# EAGLE board ADC_Block_Panel_v21 (EAGLE 7.5.0), part 1 of 7
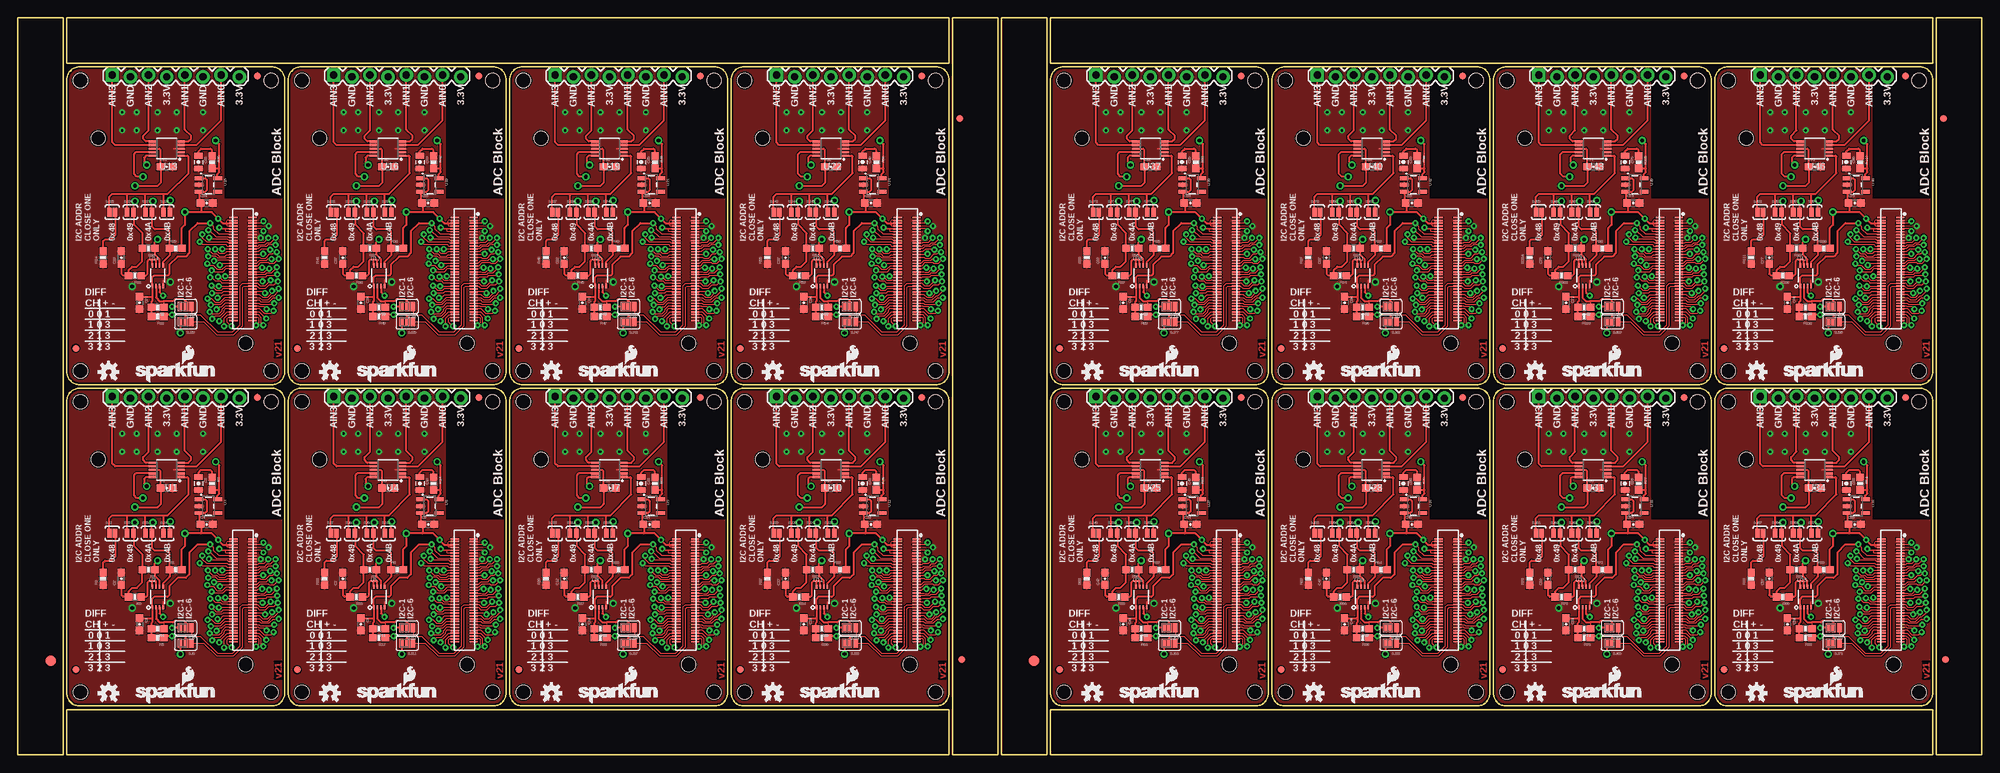
[diagram p0: board, top side]
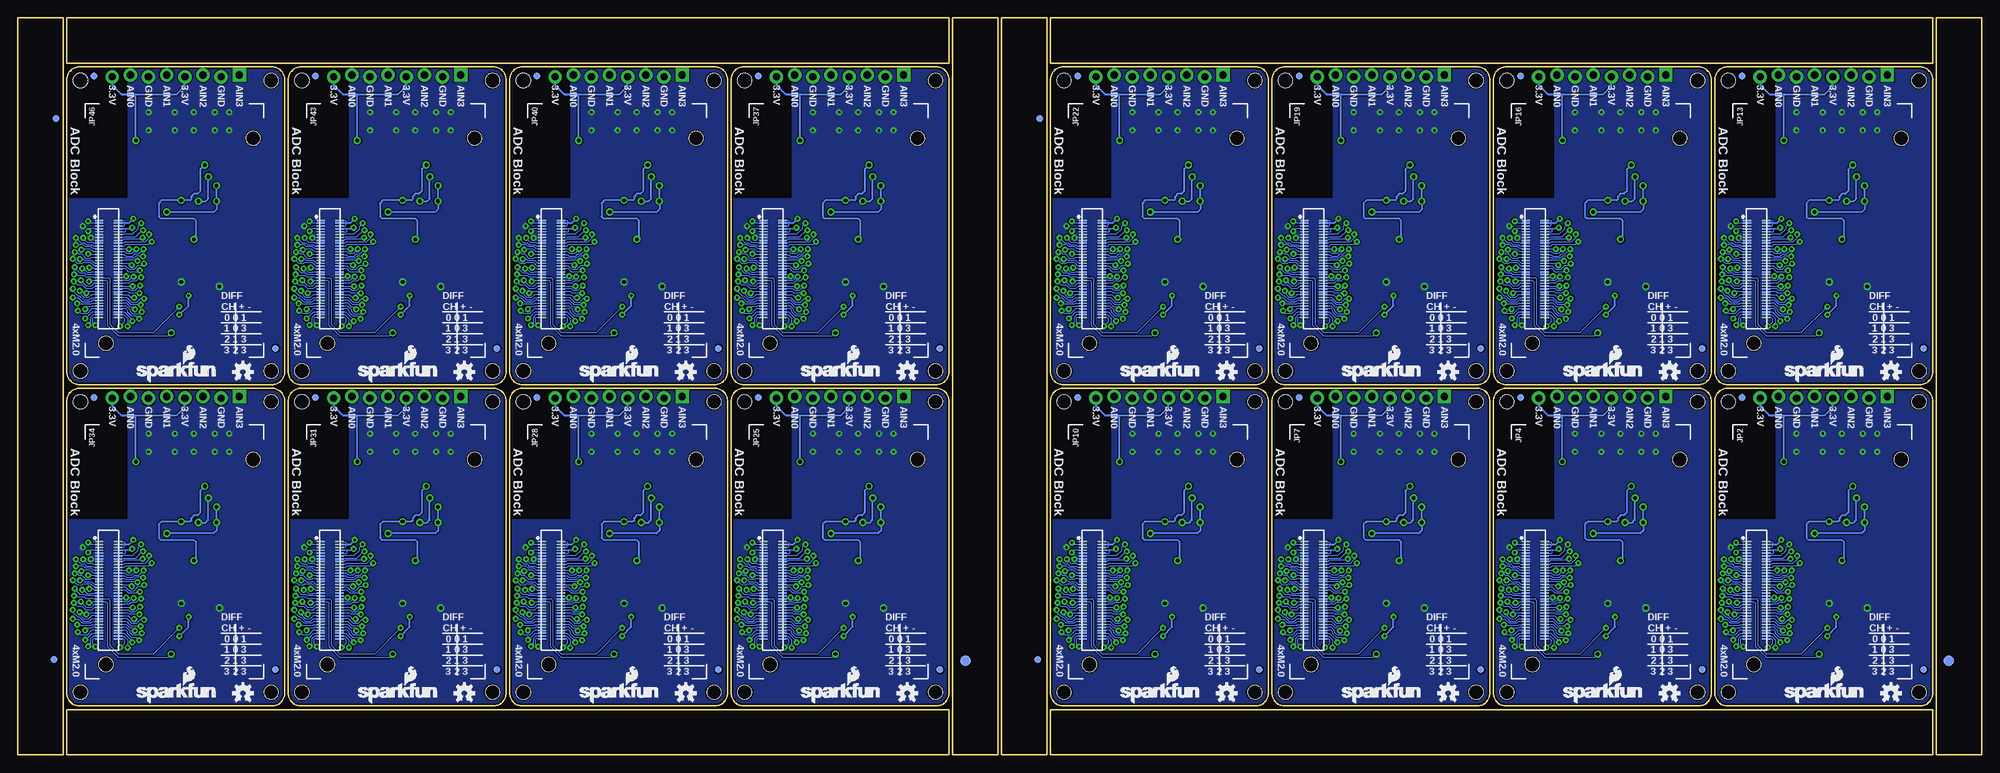
[diagram p1: board, bottom side, seen from below]

Size 274.83 x 103.12 mm. Coordinates in mm from the lower left corner, seen from the top.
Outline: 176 segments
Copper layers (1*16): Top 0.035mm / dielectric 1.5mm / Bottom 0.035mm
Design rules "Casey_Edison-2-Layer": minimum track width 6mil, minimum drill 13mil, track to track 6mil, track to pad 6mil, pad to pad 6mil, via to via 6mil, smd to smd 6mil, copper to edge 8mil, drill to drill 8mil, minimum pad ring 12mil, minimum via ring 10mil, stop-mask expansion 4mil, vias tented up to drill 20mil, thermal gap 6mil
Holes 2 mm at 35.43,8.76 8.76,8.76 8.76,49.4 35.43,49.4 66.42,8.76 39.75,8.76 39.75,49.4 66.42,49.4 97.41,8.76 70.74,8.76 70.74,49.4 97.41,49.4 128.4,8.76 101.73,8.76 101.73,49.4 128.4,49.4 35.43,53.72 8.76,53.72 8.76,94.36 35.43,94.36 66.42,53.72 39.75,53.72 39.75,94.36 66.42,94.36 97.41,53.72 70.74,53.72 70.74,94.36 97.41,94.36 128.4,53.72 101.73,53.72 101.73,94.36 128.4,94.36 173.1,8.76 146.43,8.76 146.43,49.4 173.1,49.4 204.09,8.76 177.42,8.76 177.42,49.4 204.09,49.4 235.08,8.76 208.41,8.76 208.41,49.4 235.08,49.4 266.06,8.76 239.4,8.76 239.4,49.4 266.06,49.4 173.1,53.72 146.43,53.72 146.43,94.36 173.1,94.36 204.09,53.72 177.42,53.72 177.42,94.36 204.09,94.36 235.08,53.72 208.41,53.72 208.41,94.36 235.08,94.36 266.06,53.72 239.4,53.72 239.4,94.36 266.06,94.36
tRestrict: area 29,33 to 37.3,51.3; area 59.9,33 to 68.3,51.3; area 90.9,33 to 99.3,51.3; area 121.9,33 to 130.3,51.3; area 29,78 to 37.3,96.3; area 59.9,78 to 68.3,96.3; area 90.9,78 to 99.3,96.3; area 121.9,78 to 130.3,96.3; area 166.6,33 to 175,51.3; area 197.6,33 to 206,51.3; area 228.6,33 to 237,51.3; area 259.6,33 to 268,51.3; 4 more areas; 32 lines
bRestrict: area 29,33 to 37.3,51.3; area 59.9,33 to 68.3,51.3; area 90.9,33 to 99.3,51.3; area 121.9,33 to 130.3,51.3; area 29,78 to 37.3,96.3; area 59.9,78 to 68.3,96.3; area 90.9,78 to 99.3,96.3; area 121.9,78 to 130.3,96.3; area 166.6,33 to 175,51.3; area 197.6,33 to 206,51.3; area 228.6,33 to 237,51.3; area 259.6,33 to 268,51.3; 4 more areas

## Footprints (pad centres in the part's own frame; a part is rotated, then mirrored left to right if it is on the bottom)
0603-CAP = smd 1.1 x 1: 1 -0.85,0; 2 0.85,0
0805-CAP = smd 0.8 x 1.2: 1 -0.9,0; 2 0.9,0
FIDUCIAL-1.5X3 = smd 1.5 x 1.5: 1 0,0
FIDUCIAL-1X2 = smd 1 x 1: 1 0,0
1X08_LOCK = drill 1.016 pad 1.88 square: 1 0,0.127 | drill 1.016 pad 1.88: 2 2.54,-0.127; 3 5.08,0.127; 4 7.62,-0.127; 5 10.16,0.127; 6 12.7,-0.127; 7 15.24,0.127; 8 17.78,-0.127
EDISON_DAUGHTER = smd 1.14 x 0.2: 1 1.98,19.17; 2 4.62,19.17; 3 1.98,18.77; 4 4.62,18.77; 5 1.98,18.37; 6 4.62,18.37; 7 1.98,17.97; 8 4.62,17.97; 9 1.98,17.57; 10 4.62,17.57; 11 1.98,17.17; 12 4.62,17.17; 13 1.98,16.77; 14 4.62,16.77; 15 1.98,16.37; 16 4.62,16.37; 17 1.98,15.97; 18 4.62,15.97; 19 1.98,15.57; 20 4.62,15.57; 21 1.98,15.17; 22 4.62,15.17; 23 1.98,14.77; 24 4.62,14.77; 25 1.98,14.37; 26 4.62,14.37; 27 1.98,13.97; 28 4.62,13.97; 29 1.98,13.57; 30 4.62,13.57; 31 1.98,13.17; 32 4.62,13.17; 33 1.98,12.77; 34 4.62,12.77; 35 1.98,12.37; 36 4.62,12.37; 37 1.98,11.97; 38 4.62,11.97; 39 1.98,11.57; 40 4.62,11.57; 41 1.98,11.17; 42 4.62,11.17; 43 1.98,10.77; 44 4.62,10.77; 45 1.98,10.37; 46 4.62,10.37; 47 1.98,9.97; 48 4.62,9.97; 49 1.98,9.57; 50 4.62,9.57; 51 1.98,9.17; 52 4.62,9.17; 53 1.98,8.77; 54 4.62,8.77; 55 1.98,8.37; 56 4.62,8.37; 57 1.98,7.97; 58 4.62,7.97; 59 1.98,7.57; 60 4.62,7.57; 61 1.98,7.17; 62 4.62,7.17; 63 1.98,6.77; 64 4.62,6.77; 65 1.98,6.37; 66 4.62,6.37; 67 1.98,5.97; 68 4.62,5.97; 69 1.98,5.57; 70 4.62,5.57 | hole 2: 23.53,30.67; 2.93,1.98
DF40C-70DP-0.4(51) = smd 0.2 x 1.14 bottom: 1 6.8,1.32; 2 6.8,-1.32; 3 6.4,1.32; 4 6.4,-1.32; 5 6,1.32; 6 6,-1.32; 7 5.6,1.32; 8 5.6,-1.32; 9 5.2,1.32; 10 5.2,-1.32; 11 4.8,1.32; 12 4.8,-1.32; 13 4.4,1.32; 14 4.4,-1.32; 15 4,1.32; 16 4,-1.32; 17 3.6,1.32; 18 3.6,-1.32; 19 3.2,1.32; 20 3.2,-1.32; 21 2.8,1.32; 22 2.8,-1.32; 23 2.4,1.32; 24 2.4,-1.32; 25 2,1.32; 26 2,-1.32; 27 1.6,1.32; 28 1.6,-1.32; 29 1.2,1.32; 30 1.2,-1.32; 31 0.8,1.32; 32 0.8,-1.32; 33 0.4,1.32; 34 0.4,-1.32; 35 0,1.32; 36 0,-1.32; 37 -0.4,1.32; 38 -0.4,-1.32; 39 -0.8,1.32; 40 -0.8,-1.32; 41 -1.2,1.32; 42 -1.2,-1.32; 43 -1.6,1.32; 44 -1.6,-1.32; 45 -2,1.32; 46 -2,-1.32; 47 -2.4,1.32; 48 -2.4,-1.32; 49 -2.8,1.32; 50 -2.8,-1.32; 51 -3.2,1.32; 52 -3.2,-1.32; 53 -3.6,1.32; 54 -3.6,-1.32; 55 -4,1.32; 56 -4,-1.32; 57 -4.4,1.32; 58 -4.4,-1.32; 59 -4.8,1.32; 60 -4.8,-1.32; 61 -5.2,1.32; 62 -5.2,-1.32; 63 -5.6,1.32; 64 -5.6,-1.32; 65 -6,1.32; 66 -6,-1.32; 67 -6.4,1.32; 68 -6.4,-1.32; 69 -6.8,1.32; 70 -6.8,-1.32; NC1 7.2,1.32; NC2 7.2,-1.32; NC3 -7.2,-1.32; NC4 -7.2,1.32
0603-RES = smd 1.1 x 1: 1 -0.85,0; 2 0.85,0
PAD-JUMPER-2-NC_BY_PASTE_YES_SILK = smd 0.635 x 1.27: 1 -0.401,0; 2 0.413,0
PAD-JUMPER-2-NO_YES_SILK = smd 0.635 x 1.27: 1 -0.45,0; 2 0.45,0
PAD-JUMPER-3-2OF3_NC_BY_PASTE_YES_SILK_FULL_BOX = smd 0.635 x 1.27: 1 -0.813,0; 2 0,0; 3 0.813,0
MSOP10 = smd 0.3 x 1: 1 -1,-2.05; 2 -0.5,-2.05; 3 0,-2.05; 4 0.5,-2.05; 5 1,-2.05; 6 1,2.05; 7 0.5,2.05; 8 0,2.05; 9 -0.5,2.05; 10 -1,2.05
PCA9306DC-1:1 = smd 0.25 x 0.602: 1 -0.73,-1.446; 2 -0.23,-1.446; 3 0.27,-1.446; 4 0.77,-1.446; 5 0.77,1.431; 6 0.27,1.431; 7 -0.23,1.431; 8 -0.73,1.431
SOT23-5 = smd 0.55 x 1.2: 1 -0.95,-1.3; 2 0,-1.3; 3 0.95,-1.3; 4 0.95,1.3; 5 -0.95,1.3

## Placement (x,y rotation side)
C1  0.1uF  [0603-CAP]  20.83,37.34 0 top
C2  0.1uF  [0603-CAP]  14.48,24.64 90 top
C3  0.1uF  [0603-CAP]  17.02,18.29 270 top
C4  0.1uF  [0603-CAP]  26.42,32.26 0 top
C5  10uF  [0805-CAP]  25.27,37.97 270 top
C6  0.1uF  [0603-CAP]  51.82,37.34 0 top
C7  0.1uF  [0603-CAP]  45.47,24.64 90 top
C8  0.1uF  [0603-CAP]  48.01,18.29 270 top
C9  0.1uF  [0603-CAP]  57.4,32.26 0 top
C10  10uF  [0805-CAP]  56.26,37.97 270 top
C11  0.1uF  [0603-CAP]  82.8,37.34 0 top
C12  0.1uF  [0603-CAP]  76.45,24.64 90 top
C13  0.1uF  [0603-CAP]  78.99,18.29 270 top
C14  0.1uF  [0603-CAP]  88.39,32.26 0 top
C15  10uF  [0805-CAP]  87.25,37.97 270 top
C16  0.1uF  [0603-CAP]  113.79,37.34 0 top
C17  0.1uF  [0603-CAP]  107.44,24.64 90 top
C18  0.1uF  [0603-CAP]  109.98,18.29 270 top
C19  0.1uF  [0603-CAP]  119.38,32.26 0 top
C20  10uF  [0805-CAP]  118.24,37.97 270 top
C21  0.1uF  [0603-CAP]  20.83,82.3 0 top
C22  0.1uF  [0603-CAP]  14.48,69.6 90 top
C23  0.1uF  [0603-CAP]  17.02,63.25 270 top
C24  0.1uF  [0603-CAP]  26.42,77.22 0 top
C25  10uF  [0805-CAP]  25.27,82.93 270 top
C26  0.1uF  [0603-CAP]  51.82,82.3 0 top
C27  0.1uF  [0603-CAP]  45.47,69.6 90 top
C28  0.1uF  [0603-CAP]  48.01,63.25 270 top
C29  0.1uF  [0603-CAP]  57.4,77.22 0 top
C30  10uF  [0805-CAP]  56.26,82.93 270 top
C31  0.1uF  [0603-CAP]  82.8,82.3 0 top
C32  0.1uF  [0603-CAP]  76.45,69.6 90 top
C33  0.1uF  [0603-CAP]  78.99,63.25 270 top
C34  0.1uF  [0603-CAP]  88.39,77.22 0 top
C35  10uF  [0805-CAP]  87.25,82.93 270 top
C36  0.1uF  [0603-CAP]  113.79,82.3 0 top
C37  0.1uF  [0603-CAP]  107.44,69.6 90 top
C38  0.1uF  [0603-CAP]  109.98,63.25 270 top
C39  0.1uF  [0603-CAP]  119.38,77.22 0 top
C40  10uF  [0805-CAP]  118.24,82.93 270 top
C41  0.1uF  [0603-CAP]  158.5,37.34 0 top
C42  0.1uF  [0603-CAP]  152.15,24.64 90 top
C43  0.1uF  [0603-CAP]  154.69,18.29 270 top
C44  0.1uF  [0603-CAP]  164.08,32.26 0 top
C45  10uF  [0805-CAP]  162.94,37.97 270 top
C46  0.1uF  [0603-CAP]  189.48,37.34 0 top
C47  0.1uF  [0603-CAP]  183.13,24.64 90 top
C48  0.1uF  [0603-CAP]  185.67,18.29 270 top
C49  0.1uF  [0603-CAP]  195.07,32.26 0 top
C50  10uF  [0805-CAP]  193.93,37.97 270 top
C51  0.1uF  [0603-CAP]  220.47,37.34 0 top
C52  0.1uF  [0603-CAP]  214.12,24.64 90 top
C53  0.1uF  [0603-CAP]  216.66,18.29 270 top
C54  0.1uF  [0603-CAP]  226.06,32.26 0 top
C55  10uF  [0805-CAP]  224.92,37.97 270 top
C56  0.1uF  [0603-CAP]  251.46,37.34 0 top
C57  0.1uF  [0603-CAP]  245.11,24.64 90 top
C58  0.1uF  [0603-CAP]  247.65,18.29 270 top
C59  0.1uF  [0603-CAP]  257.05,32.26 0 top
C60  10uF  [0805-CAP]  255.91,37.97 270 top
C61  0.1uF  [0603-CAP]  158.5,82.3 0 top
C62  0.1uF  [0603-CAP]  152.15,69.6 90 top
C63  0.1uF  [0603-CAP]  154.69,63.25 270 top
C64  0.1uF  [0603-CAP]  164.08,77.22 0 top
C65  10uF  [0805-CAP]  162.94,82.93 270 top
C66  0.1uF  [0603-CAP]  189.48,82.3 0 top
C67  0.1uF  [0603-CAP]  183.13,69.6 90 top
C68  0.1uF  [0603-CAP]  185.67,63.25 270 top
C69  0.1uF  [0603-CAP]  195.07,77.22 0 top
C70  10uF  [0805-CAP]  193.93,82.93 270 top
C71  0.1uF  [0603-CAP]  220.47,82.3 0 top
C72  0.1uF  [0603-CAP]  214.12,69.6 90 top
C73  0.1uF  [0603-CAP]  216.66,63.25 270 top
C74  0.1uF  [0603-CAP]  226.06,77.22 0 top
C75  10uF  [0805-CAP]  224.92,82.93 270 top
C76  0.1uF  [0603-CAP]  251.46,82.3 0 top
C77  0.1uF  [0603-CAP]  245.11,69.6 90 top
C78  0.1uF  [0603-CAP]  247.65,63.25 270 top
C79  0.1uF  [0603-CAP]  257.05,77.22 0 top
C80  10uF  [0805-CAP]  255.91,82.93 270 top
E$1  [FIDUCIAL-1.5X3]  4.57,13.21 0 top
E$2  [FIDUCIAL-1X2]  269.49,89.03 90 top
E$3  [FIDUCIAL-1X2]  269.75,13.34 270 top
E$4  [FIDUCIAL-1.5X3]  142.24,13.21 0 top
E$5  [FIDUCIAL-1.5X3]  4.57,13.21 0 bottom
E$6  [FIDUCIAL-1X2]  132.08,13.34 270 bottom
E$7  [FIDUCIAL-1X2]  131.83,89.03 90 top
E$8  [FIDUCIAL-1X2]  132.08,13.34 270 top
E$9  [FIDUCIAL-1.5X3]  142.24,13.21 0 bottom
E$10  [FIDUCIAL-1X2]  131.83,89.03 90 bottom
E$11  [FIDUCIAL-1X2]  269.75,13.34 270 bottom
E$12  [FIDUCIAL-1X2]  269.49,89.03 90 bottom
FID1  FIDUCIAL1X2  [FIDUCIAL-1X2]  8.13,11.94 0 top
FID2  FIDUCIAL1X2  [FIDUCIAL-1X2]  33.53,50.04 0 top
FID3  FIDUCIAL1X2  [FIDUCIAL-1X2]  33.53,50.04 0 bottom
FID4  FIDUCIAL1X2  [FIDUCIAL-1X2]  8.13,11.94 0 bottom
FID5  FIDUCIAL1X2  [FIDUCIAL-1X2]  39.12,11.94 0 top
FID6  FIDUCIAL1X2  [FIDUCIAL-1X2]  64.52,50.04 0 top
FID7  FIDUCIAL1X2  [FIDUCIAL-1X2]  64.52,50.04 0 bottom
FID8  FIDUCIAL1X2  [FIDUCIAL-1X2]  39.12,11.94 0 bottom
FID9  FIDUCIAL1X2  [FIDUCIAL-1X2]  70.1,11.94 0 top
FID10  FIDUCIAL1X2  [FIDUCIAL-1X2]  95.5,50.04 0 top
FID11  FIDUCIAL1X2  [FIDUCIAL-1X2]  95.5,50.04 0 bottom
FID12  FIDUCIAL1X2  [FIDUCIAL-1X2]  70.1,11.94 0 bottom
FID13  FIDUCIAL1X2  [FIDUCIAL-1X2]  101.09,11.94 0 top
FID14  FIDUCIAL1X2  [FIDUCIAL-1X2]  126.49,50.04 0 top
FID15  FIDUCIAL1X2  [FIDUCIAL-1X2]  126.49,50.04 0 bottom
FID16  FIDUCIAL1X2  [FIDUCIAL-1X2]  101.09,11.94 0 bottom
FID17  FIDUCIAL1X2  [FIDUCIAL-1X2]  8.13,56.9 0 top
FID18  FIDUCIAL1X2  [FIDUCIAL-1X2]  33.53,95 0 top
FID19  FIDUCIAL1X2  [FIDUCIAL-1X2]  33.53,95 0 bottom
FID20  FIDUCIAL1X2  [FIDUCIAL-1X2]  8.13,56.9 0 bottom
FID21  FIDUCIAL1X2  [FIDUCIAL-1X2]  39.12,56.9 0 top
FID22  FIDUCIAL1X2  [FIDUCIAL-1X2]  64.52,95 0 top
FID23  FIDUCIAL1X2  [FIDUCIAL-1X2]  64.52,95 0 bottom
FID24  FIDUCIAL1X2  [FIDUCIAL-1X2]  39.12,56.9 0 bottom
FID25  FIDUCIAL1X2  [FIDUCIAL-1X2]  70.1,56.9 0 top
FID26  FIDUCIAL1X2  [FIDUCIAL-1X2]  95.5,95 0 top
FID27  FIDUCIAL1X2  [FIDUCIAL-1X2]  95.5,95 0 bottom
FID28  FIDUCIAL1X2  [FIDUCIAL-1X2]  70.1,56.9 0 bottom
FID29  FIDUCIAL1X2  [FIDUCIAL-1X2]  101.09,56.9 0 top
FID30  FIDUCIAL1X2  [FIDUCIAL-1X2]  126.49,95 0 top
FID31  FIDUCIAL1X2  [FIDUCIAL-1X2]  126.49,95 0 bottom
FID32  FIDUCIAL1X2  [FIDUCIAL-1X2]  101.09,56.9 0 bottom
FID33  FIDUCIAL1X2  [FIDUCIAL-1X2]  145.8,11.94 0 top
FID34  FIDUCIAL1X2  [FIDUCIAL-1X2]  171.2,50.04 0 top
FID35  FIDUCIAL1X2  [FIDUCIAL-1X2]  171.2,50.04 0 bottom
FID36  FIDUCIAL1X2  [FIDUCIAL-1X2]  145.8,11.94 0 bottom
FID37  FIDUCIAL1X2  [FIDUCIAL-1X2]  176.78,11.94 0 top
FID38  FIDUCIAL1X2  [FIDUCIAL-1X2]  202.18,50.04 0 top
FID39  FIDUCIAL1X2  [FIDUCIAL-1X2]  202.18,50.04 0 bottom
FID40  FIDUCIAL1X2  [FIDUCIAL-1X2]  176.78,11.94 0 bottom
FID41  FIDUCIAL1X2  [FIDUCIAL-1X2]  207.77,11.94 0 top
FID42  FIDUCIAL1X2  [FIDUCIAL-1X2]  233.17,50.04 0 top
FID43  FIDUCIAL1X2  [FIDUCIAL-1X2]  233.17,50.04 0 bottom
FID44  FIDUCIAL1X2  [FIDUCIAL-1X2]  207.77,11.94 0 bottom
FID45  FIDUCIAL1X2  [FIDUCIAL-1X2]  238.76,11.94 0 top
FID46  FIDUCIAL1X2  [FIDUCIAL-1X2]  264.16,50.04 0 top
FID47  FIDUCIAL1X2  [FIDUCIAL-1X2]  264.16,50.04 0 bottom
FID48  FIDUCIAL1X2  [FIDUCIAL-1X2]  238.76,11.94 0 bottom
FID49  FIDUCIAL1X2  [FIDUCIAL-1X2]  145.8,56.9 0 top
FID50  FIDUCIAL1X2  [FIDUCIAL-1X2]  171.2,95 0 top
FID51  FIDUCIAL1X2  [FIDUCIAL-1X2]  171.2,95 0 bottom
FID52  FIDUCIAL1X2  [FIDUCIAL-1X2]  145.8,56.9 0 bottom
FID53  FIDUCIAL1X2  [FIDUCIAL-1X2]  176.78,56.9 0 top
FID54  FIDUCIAL1X2  [FIDUCIAL-1X2]  202.18,95 0 top
FID55  FIDUCIAL1X2  [FIDUCIAL-1X2]  202.18,95 0 bottom
FID56  FIDUCIAL1X2  [FIDUCIAL-1X2]  176.78,56.9 0 bottom
FID57  FIDUCIAL1X2  [FIDUCIAL-1X2]  207.77,56.9 0 top
FID58  FIDUCIAL1X2  [FIDUCIAL-1X2]  233.17,95 0 top
FID59  FIDUCIAL1X2  [FIDUCIAL-1X2]  233.17,95 0 bottom
FID60  FIDUCIAL1X2  [FIDUCIAL-1X2]  207.77,56.9 0 bottom
FID61  FIDUCIAL1X2  [FIDUCIAL-1X2]  238.76,56.9 0 top
FID62  FIDUCIAL1X2  [FIDUCIAL-1X2]  264.16,95 0 top
FID63  FIDUCIAL1X2  [FIDUCIAL-1X2]  264.16,95 0 bottom
FID64  FIDUCIAL1X2  [FIDUCIAL-1X2]  238.76,56.9 0 bottom
JP1  [1X08_LOCK]  13.21,50.04 0 top
JP2  EDISON_CONNECTOR_FULLMOUNTING_HOLES  [EDISON_DAUGHTER]  34.8,10.67 0 bottom
JP3  EDISON_CONNECTOR_FULLHEADER  [DF40C-70DP-0.4(51)]  31.5,23.04 90 bottom
JP4  EDISON_CONNECTOR_FULLMOUNTING_HOLES  [EDISON_DAUGHTER]  65.79,10.67 0 bottom
JP5  EDISON_CONNECTOR_FULLHEADER  [DF40C-70DP-0.4(51)]  62.49,23.04 90 bottom
JP6  [1X08_LOCK]  44.2,50.04 0 top
JP7  EDISON_CONNECTOR_FULLMOUNTING_HOLES  [EDISON_DAUGHTER]  96.77,10.67 0 bottom
JP8  EDISON_CONNECTOR_FULLHEADER  [DF40C-70DP-0.4(51)]  93.47,23.04 90 bottom
JP9  [1X08_LOCK]  75.18,50.04 0 top
JP10  EDISON_CONNECTOR_FULLMOUNTING_HOLES  [EDISON_DAUGHTER]  127.76,10.67 0 bottom
JP11  EDISON_CONNECTOR_FULLHEADER  [DF40C-70DP-0.4(51)]  124.46,23.04 90 bottom
JP12  [1X08_LOCK]  106.17,50.04 0 top
JP13  EDISON_CONNECTOR_FULLMOUNTING_HOLES  [EDISON_DAUGHTER]  34.8,55.63 0 bottom
JP14  EDISON_CONNECTOR_FULLHEADER  [DF40C-70DP-0.4(51)]  31.5,68 90 bottom
JP15  [1X08_LOCK]  13.21,95 0 top
JP16  EDISON_CONNECTOR_FULLMOUNTING_HOLES  [EDISON_DAUGHTER]  65.79,55.63 0 bottom
JP17  EDISON_CONNECTOR_FULLHEADER  [DF40C-70DP-0.4(51)]  62.49,68 90 bottom
JP18  [1X08_LOCK]  44.2,95 0 top
JP19  EDISON_CONNECTOR_FULLMOUNTING_HOLES  [EDISON_DAUGHTER]  96.77,55.63 0 bottom
JP20  EDISON_CONNECTOR_FULLHEADER  [DF40C-70DP-0.4(51)]  93.47,68 90 bottom
JP21  [1X08_LOCK]  75.18,95 0 top
JP22  EDISON_CONNECTOR_FULLMOUNTING_HOLES  [EDISON_DAUGHTER]  127.76,55.63 0 bottom
JP23  EDISON_CONNECTOR_FULLHEADER  [DF40C-70DP-0.4(51)]  124.46,68 90 bottom
JP24  [1X08_LOCK]  106.17,95 0 top
JP25  EDISON_CONNECTOR_FULLMOUNTING_HOLES  [EDISON_DAUGHTER]  172.47,10.67 0 bottom
JP26  EDISON_CONNECTOR_FULLHEADER  [DF40C-70DP-0.4(51)]  169.17,23.04 90 bottom
JP27  [1X08_LOCK]  150.88,50.04 0 top
JP28  EDISON_CONNECTOR_FULLMOUNTING_HOLES  [EDISON_DAUGHTER]  203.45,10.67 0 bottom
JP29  EDISON_CONNECTOR_FULLHEADER  [DF40C-70DP-0.4(51)]  200.15,23.04 90 bottom
JP30  [1X08_LOCK]  181.86,50.04 0 top
JP31  EDISON_CONNECTOR_FULLMOUNTING_HOLES  [EDISON_DAUGHTER]  234.44,10.67 0 bottom
JP32  EDISON_CONNECTOR_FULLHEADER  [DF40C-70DP-0.4(51)]  231.14,23.04 90 bottom
JP33  [1X08_LOCK]  212.85,50.04 0 top
JP34  EDISON_CONNECTOR_FULLMOUNTING_HOLES  [EDISON_DAUGHTER]  265.43,10.67 0 bottom
JP35  EDISON_CONNECTOR_FULLHEADER  [DF40C-70DP-0.4(51)]  262.13,23.04 90 bottom
JP36  [1X08_LOCK]  243.84,50.04 0 top
JP37  EDISON_CONNECTOR_FULLMOUNTING_HOLES  [EDISON_DAUGHTER]  172.47,55.63 0 bottom
JP38  EDISON_CONNECTOR_FULLHEADER  [DF40C-70DP-0.4(51)]  169.17,68 90 bottom
JP39  [1X08_LOCK]  150.88,95 0 top
JP40  EDISON_CONNECTOR_FULLMOUNTING_HOLES  [EDISON_DAUGHTER]  203.45,55.63 0 bottom
JP41  EDISON_CONNECTOR_FULLHEADER  [DF40C-70DP-0.4(51)]  200.15,68 90 bottom
JP42  [1X08_LOCK]  181.86,95 0 top
JP43  EDISON_CONNECTOR_FULLMOUNTING_HOLES  [EDISON_DAUGHTER]  234.44,55.63 0 bottom
JP44  EDISON_CONNECTOR_FULLHEADER  [DF40C-70DP-0.4(51)]  231.14,68 90 bottom
JP45  [1X08_LOCK]  212.85,95 0 top
JP46  EDISON_CONNECTOR_FULLMOUNTING_HOLES  [EDISON_DAUGHTER]  265.43,55.63 0 bottom
JP47  EDISON_CONNECTOR_FULLHEADER  [DF40C-70DP-0.4(51)]  262.13,68 90 bottom
JP48  [1X08_LOCK]  243.84,95 0 top
LOGO1  SFE_LOGO_NAME_FLAME.1_INCH  [SFE_LOGO_NAME_FLAME_.1]  16.13,7.11 0 top
LOGO2  OSHW-LOGOS  [OSHW-LOGO-S]  12.7,8.64 0 bottom
LOGO3  SFE_LOGO_NAME_FLAME.1_INCH  [SFE_LOGO_NAME_FLAME_.1]  27.94,7.11 0 bottom
LOGO4  OSHW-LOGOS  [OSHW-LOGO-S]  12.7,8.64 0 top
LOGO5  OSHW-LOGOS  [OSHW-LOGO-S]  43.69,8.64 0 bottom
LOGO6  SFE_LOGO_NAME_FLAME.1_INCH  [SFE_LOGO_NAME_FLAME_.1]  58.93,7.11 0 bottom
LOGO7  SFE_LOGO_NAME_FLAME.1_INCH  [SFE_LOGO_NAME_FLAME_.1]  47.12,7.11 0 top
LOGO8  OSHW-LOGOS  [OSHW-LOGO-S]  43.69,8.64 0 top
LOGO9  OSHW-LOGOS  [OSHW-LOGO-S]  74.68,8.64 0 bottom
LOGO10  SFE_LOGO_NAME_FLAME.1_INCH  [SFE_LOGO_NAME_FLAME_.1]  89.92,7.11 0 bottom
LOGO11  SFE_LOGO_NAME_FLAME.1_INCH  [SFE_LOGO_NAME_FLAME_.1]  78.11,7.11 0 top
LOGO12  OSHW-LOGOS  [OSHW-LOGO-S]  74.68,8.64 0 top
LOGO13  OSHW-LOGOS  [OSHW-LOGO-S]  105.66,8.64 0 bottom
LOGO14  SFE_LOGO_NAME_FLAME.1_INCH  [SFE_LOGO_NAME_FLAME_.1]  120.9,7.11 0 bottom
LOGO15  SFE_LOGO_NAME_FLAME.1_INCH  [SFE_LOGO_NAME_FLAME_.1]  109.09,7.11 0 top
LOGO16  OSHW-LOGOS  [OSHW-LOGO-S]  105.66,8.64 0 top
LOGO17  OSHW-LOGOS  [OSHW-LOGO-S]  12.7,53.59 0 bottom
LOGO18  SFE_LOGO_NAME_FLAME.1_INCH  [SFE_LOGO_NAME_FLAME_.1]  27.94,52.07 0 bottom
LOGO19  SFE_LOGO_NAME_FLAME.1_INCH  [SFE_LOGO_NAME_FLAME_.1]  16.13,52.07 0 top
LOGO20  OSHW-LOGOS  [OSHW-LOGO-S]  12.7,53.59 0 top
LOGO21  OSHW-LOGOS  [OSHW-LOGO-S]  43.69,53.59 0 bottom
LOGO22  SFE_LOGO_NAME_FLAME.1_INCH  [SFE_LOGO_NAME_FLAME_.1]  58.93,52.07 0 bottom
LOGO23  SFE_LOGO_NAME_FLAME.1_INCH  [SFE_LOGO_NAME_FLAME_.1]  47.12,52.07 0 top
LOGO24  OSHW-LOGOS  [OSHW-LOGO-S]  43.69,53.59 0 top
LOGO25  OSHW-LOGOS  [OSHW-LOGO-S]  74.68,53.59 0 bottom
LOGO26  SFE_LOGO_NAME_FLAME.1_INCH  [SFE_LOGO_NAME_FLAME_.1]  89.92,52.07 0 bottom
LOGO27  SFE_LOGO_NAME_FLAME.1_INCH  [SFE_LOGO_NAME_FLAME_.1]  78.11,52.07 0 top
LOGO28  OSHW-LOGOS  [OSHW-LOGO-S]  74.68,53.59 0 top
LOGO29  OSHW-LOGOS  [OSHW-LOGO-S]  105.66,53.59 0 bottom
LOGO30  SFE_LOGO_NAME_FLAME.1_INCH  [SFE_LOGO_NAME_FLAME_.1]  120.9,52.07 0 bottom
LOGO31  SFE_LOGO_NAME_FLAME.1_INCH  [SFE_LOGO_NAME_FLAME_.1]  109.09,52.07 0 top
LOGO32  OSHW-LOGOS  [OSHW-LOGO-S]  105.66,53.59 0 top
LOGO33  OSHW-LOGOS  [OSHW-LOGO-S]  150.37,8.64 0 bottom
LOGO34  SFE_LOGO_NAME_FLAME.1_INCH  [SFE_LOGO_NAME_FLAME_.1]  165.61,7.11 0 bottom
LOGO35  SFE_LOGO_NAME_FLAME.1_INCH  [SFE_LOGO_NAME_FLAME_.1]  153.8,7.11 0 top
LOGO36  OSHW-LOGOS  [OSHW-LOGO-S]  150.37,8.64 0 top
LOGO37  OSHW-LOGOS  [OSHW-LOGO-S]  181.36,8.64 0 bottom
LOGO38  SFE_LOGO_NAME_FLAME.1_INCH  [SFE_LOGO_NAME_FLAME_.1]  196.6,7.11 0 bottom
LOGO39  SFE_LOGO_NAME_FLAME.1_INCH  [SFE_LOGO_NAME_FLAME_.1]  184.78,7.11 0 top
LOGO40  OSHW-LOGOS  [OSHW-LOGO-S]  181.36,8.64 0 top
LOGO41  OSHW-LOGOS  [OSHW-LOGO-S]  212.34,8.64 0 bottom
LOGO42  SFE_LOGO_NAME_FLAME.1_INCH  [SFE_LOGO_NAME_FLAME_.1]  227.58,7.11 0 bottom
LOGO43  SFE_LOGO_NAME_FLAME.1_INCH  [SFE_LOGO_NAME_FLAME_.1]  215.77,7.11 0 top
LOGO44  OSHW-LOGOS  [OSHW-LOGO-S]  212.34,8.64 0 top
LOGO45  OSHW-LOGOS  [OSHW-LOGO-S]  243.33,8.64 0 bottom
LOGO46  SFE_LOGO_NAME_FLAME.1_INCH  [SFE_LOGO_NAME_FLAME_.1]  258.57,7.11 0 bottom
LOGO47  SFE_LOGO_NAME_FLAME.1_INCH  [SFE_LOGO_NAME_FLAME_.1]  246.76,7.11 0 top
LOGO48  OSHW-LOGOS  [OSHW-LOGO-S]  243.33,8.64 0 top
LOGO49  OSHW-LOGOS  [OSHW-LOGO-S]  150.37,53.59 0 bottom
LOGO50  SFE_LOGO_NAME_FLAME.1_INCH  [SFE_LOGO_NAME_FLAME_.1]  165.61,52.07 0 bottom
LOGO51  SFE_LOGO_NAME_FLAME.1_INCH  [SFE_LOGO_NAME_FLAME_.1]  153.8,52.07 0 top
LOGO52  OSHW-LOGOS  [OSHW-LOGO-S]  150.37,53.59 0 top
LOGO53  OSHW-LOGOS  [OSHW-LOGO-S]  181.36,53.59 0 bottom
LOGO54  SFE_LOGO_NAME_FLAME.1_INCH  [SFE_LOGO_NAME_FLAME_.1]  196.6,52.07 0 bottom
LOGO55  SFE_LOGO_NAME_FLAME.1_INCH  [SFE_LOGO_NAME_FLAME_.1]  184.78,52.07 0 top
LOGO56  OSHW-LOGOS  [OSHW-LOGO-S]  181.36,53.59 0 top
LOGO57  OSHW-LOGOS  [OSHW-LOGO-S]  212.34,53.59 0 bottom
LOGO58  SFE_LOGO_NAME_FLAME.1_INCH  [SFE_LOGO_NAME_FLAME_.1]  227.58,52.07 0 bottom
LOGO59  SFE_LOGO_NAME_FLAME.1_INCH  [SFE_LOGO_NAME_FLAME_.1]  215.77,52.07 0 top
LOGO60  OSHW-LOGOS  [OSHW-LOGO-S]  212.34,53.59 0 top
LOGO61  OSHW-LOGOS  [OSHW-LOGO-S]  243.33,53.59 0 bottom
LOGO62  SFE_LOGO_NAME_FLAME.1_INCH  [SFE_LOGO_NAME_FLAME_.1]  258.57,52.07 0 bottom
LOGO63  SFE_LOGO_NAME_FLAME.1_INCH  [SFE_LOGO_NAME_FLAME_.1]  246.76,52.07 0 top
LOGO64  OSHW-LOGOS  [OSHW-LOGO-S]  243.33,53.59 0 top
R1  10K  [0603-RES]  22.1,25.91 0 top
R2  10K  [0603-RES]  18.29,25.91 180 top
R3  200k  [0603-RES]  16.38,22.1 180 top
R4  DNP  [0603-RES]  19.56,17.65 180 top
R5  DNP  [0603-RES]  19.56,16.38 180 top
R6  2.2k  [0603-RES]  11.94,24.64 90 top
R7  0.27  [0603-RES]  27.18,37.97 270 top
R8  10K  [0603-RES]  53.09,25.91 0 top
R9  10K  [0603-RES]  49.28,25.91 180 top
R10  200k  [0603-RES]  47.37,22.1 180 top
R11  DNP  [0603-RES]  50.55,17.65 180 top
R12  DNP  [0603-RES]  50.55,16.38 180 top
R13  2.2k  [0603-RES]  42.93,24.64 90 top
R14  0.27  [0603-RES]  58.17,37.97 270 top
R15  10K  [0603-RES]  84.07,25.91 0 top
R16  10K  [0603-RES]  80.26,25.91 180 top
R17  200k  [0603-RES]  78.36,22.1 180 top
R18  DNP  [0603-RES]  81.53,17.65 180 top
R19  DNP  [0603-RES]  81.53,16.38 180 top
R20  2.2k  [0603-RES]  73.91,24.64 90 top
R21  0.27  [0603-RES]  89.15,37.97 270 top
R22  10K  [0603-RES]  115.06,25.91 0 top
R23  10K  [0603-RES]  111.25,25.91 180 top
R24  200k  [0603-RES]  109.35,22.1 180 top
R25  DNP  [0603-RES]  112.52,17.65 180 top
R26  DNP  [0603-RES]  112.52,16.38 180 top
R27  2.2k  [0603-RES]  104.9,24.64 90 top
R28  0.27  [0603-RES]  120.14,37.97 270 top
R29  10K  [0603-RES]  22.1,70.87 0 top
R30  10K  [0603-RES]  18.29,70.87 180 top
R31  200k  [0603-RES]  16.38,67.06 180 top
R32  DNP  [0603-RES]  19.56,62.61 180 top
R33  DNP  [0603-RES]  19.56,61.34 180 top
R34  2.2k  [0603-RES]  11.94,69.6 90 top
R35  0.27  [0603-RES]  27.18,82.93 270 top
R36  10K  [0603-RES]  53.09,70.87 0 top
R37  10K  [0603-RES]  49.28,70.87 180 top
R38  200k  [0603-RES]  47.37,67.06 180 top
R39  DNP  [0603-RES]  50.55,62.61 180 top
R40  DNP  [0603-RES]  50.55,61.34 180 top
R41  2.2k  [0603-RES]  42.93,69.6 90 top
R42  0.27  [0603-RES]  58.17,82.93 270 top
R43  10K  [0603-RES]  84.07,70.87 0 top
R44  10K  [0603-RES]  80.26,70.87 180 top
R45  200k  [0603-RES]  78.36,67.06 180 top
R46  DNP  [0603-RES]  81.53,62.61 180 top
R47  DNP  [0603-RES]  81.53,61.34 180 top
R48  2.2k  [0603-RES]  73.91,69.6 90 top
R49  0.27  [0603-RES]  89.15,82.93 270 top
R50  10K  [0603-RES]  115.06,70.87 0 top
R51  10K  [0603-RES]  111.25,70.87 180 top
R52  200k  [0603-RES]  109.35,67.06 180 top
R53  DNP  [0603-RES]  112.52,62.61 180 top
R54  DNP  [0603-RES]  112.52,61.34 180 top
R55  2.2k  [0603-RES]  104.9,69.6 90 top
R56  0.27  [0603-RES]  120.14,82.93 270 top
R57  10K  [0603-RES]  159.77,25.91 0 top
R58  10K  [0603-RES]  155.96,25.91 180 top
R59  200k  [0603-RES]  154.05,22.1 180 top
R60  DNP  [0603-RES]  157.23,17.65 180 top
R61  DNP  [0603-RES]  157.23,16.38 180 top
R62  2.2k  [0603-RES]  149.61,24.64 90 top
R63  0.27  [0603-RES]  164.85,37.97 270 top
R64  10K  [0603-RES]  190.75,25.91 0 top
R65  10K  [0603-RES]  186.94,25.91 180 top
R66  200k  [0603-RES]  185.04,22.1 180 top
R67  DNP  [0603-RES]  188.21,17.65 180 top
R68  DNP  [0603-RES]  188.21,16.38 180 top
R69  2.2k  [0603-RES]  180.59,24.64 90 top
R70  0.27  [0603-RES]  195.83,37.97 270 top
R71  10K  [0603-RES]  221.74,25.91 0 top
R72  10K  [0603-RES]  217.93,25.91 180 top
R73  200k  [0603-RES]  216.03,22.1 180 top
R74  DNP  [0603-RES]  219.2,17.65 180 top
R75  DNP  [0603-RES]  219.2,16.38 180 top
R76  2.2k  [0603-RES]  211.58,24.64 90 top
R77  0.27  [0603-RES]  226.82,37.97 270 top
R78  10K  [0603-RES]  252.73,25.91 0 top
R79  10K  [0603-RES]  248.92,25.91 180 top
R80  200k  [0603-RES]  247.01,22.1 180 top
R81  DNP  [0603-RES]  250.19,17.65 180 top
R82  DNP  [0603-RES]  250.19,16.38 180 top
R83  2.2k  [0603-RES]  242.57,24.64 90 top
R84  0.27  [0603-RES]  257.81,37.97 270 top
R85  10K  [0603-RES]  159.77,70.87 0 top
R86  10K  [0603-RES]  155.96,70.87 180 top
R87  200k  [0603-RES]  154.05,67.06 180 top
R88  DNP  [0603-RES]  157.23,62.61 180 top
R89  DNP  [0603-RES]  157.23,61.34 180 top
R90  2.2k  [0603-RES]  149.61,69.6 90 top
R91  0.27  [0603-RES]  164.85,82.93 270 top
R92  10K  [0603-RES]  190.75,70.87 0 top
R93  10K  [0603-RES]  186.94,70.87 180 top
R94  200k  [0603-RES]  185.04,67.06 180 top
R95  DNP  [0603-RES]  188.21,62.61 180 top
R96  DNP  [0603-RES]  188.21,61.34 180 top
R97  2.2k  [0603-RES]  180.59,69.6 90 top
R98  0.27  [0603-RES]  195.83,82.93 270 top
R99  10K  [0603-RES]  221.74,70.87 0 top
R100  10K  [0603-RES]  217.93,70.87 180 top
R101  200k  [0603-RES]  216.03,67.06 180 top
R102  DNP  [0603-RES]  219.2,62.61 180 top
R103  DNP  [0603-RES]  219.2,61.34 180 top
R104  2.2k  [0603-RES]  211.58,69.6 90 top
R105  0.27  [0603-RES]  226.82,82.93 270 top
R106  10K  [0603-RES]  252.73,70.87 0 top
R107  10K  [0603-RES]  248.92,70.87 180 top
R108  200k  [0603-RES]  247.01,67.06 180 top
R109  DNP  [0603-RES]  250.19,62.61 180 top
R110  DNP  [0603-RES]  250.19,61.34 180 top
R111  2.2k  [0603-RES]  242.57,69.6 90 top
R112  0.27  [0603-RES]  257.81,82.93 270 top
SJ1  JUMPER-PAD-2-NC_BY_PASTE  [PAD-JUMPER-2-NC_BY_PASTE_YES_SILK]  13.21,30.99 0 top
SJ2  JUMPER-PAD-2-NOYES_SILK  [PAD-JUMPER-2-NO_YES_SILK]  15.75,30.99 0 top
SJ3  JUMPER-PAD-2-NOYES_SILK  [PAD-JUMPER-2-NO_YES_SILK]  18.29,30.99 0 top
SJ4  JUMPER-PAD-2-NOYES_SILK  [PAD-JUMPER-2-NO_YES_SILK]  20.83,30.99 0 top
SJ5  SDA_SEL  [PAD-JUMPER-3-2OF3_NC_BY_PASTE_YES_SILK_FULL_BOX]  23.5,15.62 180 top
SJ6  SCL_SEL  [PAD-JUMPER-3-2OF3_NC_BY_PASTE_YES_SILK_FULL_BOX]  23.5,17.78 180 top
SJ7  JUMPER-PAD-2-NC_BY_PASTE  [PAD-JUMPER-2-NC_BY_PASTE_YES_SILK]  44.2,30.99 0 top
SJ8  JUMPER-PAD-2-NOYES_SILK  [PAD-JUMPER-2-NO_YES_SILK]  46.74,30.99 0 top
SJ9  JUMPER-PAD-2-NOYES_SILK  [PAD-JUMPER-2-NO_YES_SILK]  49.28,30.99 0 top
SJ10  JUMPER-PAD-2-NOYES_SILK  [PAD-JUMPER-2-NO_YES_SILK]  51.82,30.99 0 top
SJ11  SDA_SEL  [PAD-JUMPER-3-2OF3_NC_BY_PASTE_YES_SILK_FULL_BOX]  54.48,15.62 180 top
SJ12  SCL_SEL  [PAD-JUMPER-3-2OF3_NC_BY_PASTE_YES_SILK_FULL_BOX]  54.48,17.78 180 top
SJ13  JUMPER-PAD-2-NC_BY_PASTE  [PAD-JUMPER-2-NC_BY_PASTE_YES_SILK]  75.18,30.99 0 top
SJ14  JUMPER-PAD-2-NOYES_SILK  [PAD-JUMPER-2-NO_YES_SILK]  77.72,30.99 0 top
SJ15  JUMPER-PAD-2-NOYES_SILK  [PAD-JUMPER-2-NO_YES_SILK]  80.26,30.99 0 top
SJ16  JUMPER-PAD-2-NOYES_SILK  [PAD-JUMPER-2-NO_YES_SILK]  82.8,30.99 0 top
SJ17  SDA_SEL  [PAD-JUMPER-3-2OF3_NC_BY_PASTE_YES_SILK_FULL_BOX]  85.47,15.62 180 top
SJ18  SCL_SEL  [PAD-JUMPER-3-2OF3_NC_BY_PASTE_YES_SILK_FULL_BOX]  85.47,17.78 180 top
SJ19  JUMPER-PAD-2-NC_BY_PASTE  [PAD-JUMPER-2-NC_BY_PASTE_YES_SILK]  106.17,30.99 0 top
SJ20  JUMPER-PAD-2-NOYES_SILK  [PAD-JUMPER-2-NO_YES_SILK]  108.71,30.99 0 top
SJ21  JUMPER-PAD-2-NOYES_SILK  [PAD-JUMPER-2-NO_YES_SILK]  111.25,30.99 0 top
SJ22  JUMPER-PAD-2-NOYES_SILK  [PAD-JUMPER-2-NO_YES_SILK]  113.79,30.99 0 top
SJ23  SDA_SEL  [PAD-JUMPER-3-2OF3_NC_BY_PASTE_YES_SILK_FULL_BOX]  116.46,15.62 180 top
SJ24  SCL_SEL  [PAD-JUMPER-3-2OF3_NC_BY_PASTE_YES_SILK_FULL_BOX]  116.46,17.78 180 top
SJ25  JUMPER-PAD-2-NC_BY_PASTE  [PAD-JUMPER-2-NC_BY_PASTE_YES_SILK]  13.21,75.95 0 top
SJ26  JUMPER-PAD-2-NOYES_SILK  [PAD-JUMPER-2-NO_YES_SILK]  15.75,75.95 0 top
SJ27  JUMPER-PAD-2-NOYES_SILK  [PAD-JUMPER-2-NO_YES_SILK]  18.29,75.95 0 top
SJ28  JUMPER-PAD-2-NOYES_SILK  [PAD-JUMPER-2-NO_YES_SILK]  20.83,75.95 0 top
SJ29  SDA_SEL  [PAD-JUMPER-3-2OF3_NC_BY_PASTE_YES_SILK_FULL_BOX]  23.5,60.58 180 top
SJ30  SCL_SEL  [PAD-JUMPER-3-2OF3_NC_BY_PASTE_YES_SILK_FULL_BOX]  23.5,62.74 180 top
SJ31  JUMPER-PAD-2-NC_BY_PASTE  [PAD-JUMPER-2-NC_BY_PASTE_YES_SILK]  44.2,75.95 0 top
SJ32  JUMPER-PAD-2-NOYES_SILK  [PAD-JUMPER-2-NO_YES_SILK]  46.74,75.95 0 top
SJ33  JUMPER-PAD-2-NOYES_SILK  [PAD-JUMPER-2-NO_YES_SILK]  49.28,75.95 0 top
SJ34  JUMPER-PAD-2-NOYES_SILK  [PAD-JUMPER-2-NO_YES_SILK]  51.82,75.95 0 top
SJ35  SDA_SEL  [PAD-JUMPER-3-2OF3_NC_BY_PASTE_YES_SILK_FULL_BOX]  54.48,60.58 180 top
SJ36  SCL_SEL  [PAD-JUMPER-3-2OF3_NC_BY_PASTE_YES_SILK_FULL_BOX]  54.48,62.74 180 top
SJ37  JUMPER-PAD-2-NC_BY_PASTE  [PAD-JUMPER-2-NC_BY_PASTE_YES_SILK]  75.18,75.95 0 top
SJ38  JUMPER-PAD-2-NOYES_SILK  [PAD-JUMPER-2-NO_YES_SILK]  77.72,75.95 0 top
SJ39  JUMPER-PAD-2-NOYES_SILK  [PAD-JUMPER-2-NO_YES_SILK]  80.26,75.95 0 top
SJ40  JUMPER-PAD-2-NOYES_SILK  [PAD-JUMPER-2-NO_YES_SILK]  82.8,75.95 0 top
SJ41  SDA_SEL  [PAD-JUMPER-3-2OF3_NC_BY_PASTE_YES_SILK_FULL_BOX]  85.47,60.58 180 top
SJ42  SCL_SEL  [PAD-JUMPER-3-2OF3_NC_BY_PASTE_YES_SILK_FULL_BOX]  85.47,62.74 180 top
SJ43  JUMPER-PAD-2-NC_BY_PASTE  [PAD-JUMPER-2-NC_BY_PASTE_YES_SILK]  106.17,75.95 0 top
SJ44  JUMPER-PAD-2-NOYES_SILK  [PAD-JUMPER-2-NO_YES_SILK]  108.71,75.95 0 top
SJ45  JUMPER-PAD-2-NOYES_SILK  [PAD-JUMPER-2-NO_YES_SILK]  111.25,75.95 0 top
SJ46  JUMPER-PAD-2-NOYES_SILK  [PAD-JUMPER-2-NO_YES_SILK]  113.79,75.95 0 top
SJ47  SDA_SEL  [PAD-JUMPER-3-2OF3_NC_BY_PASTE_YES_SILK_FULL_BOX]  116.46,60.58 180 top
SJ48  SCL_SEL  [PAD-JUMPER-3-2OF3_NC_BY_PASTE_YES_SILK_FULL_BOX]  116.46,62.74 180 top
SJ49  JUMPER-PAD-2-NC_BY_PASTE  [PAD-JUMPER-2-NC_BY_PASTE_YES_SILK]  150.88,30.99 0 top
SJ50  JUMPER-PAD-2-NOYES_SILK  [PAD-JUMPER-2-NO_YES_SILK]  153.42,30.99 0 top
SJ51  JUMPER-PAD-2-NOYES_SILK  [PAD-JUMPER-2-NO_YES_SILK]  155.96,30.99 0 top
SJ52  JUMPER-PAD-2-NOYES_SILK  [PAD-JUMPER-2-NO_YES_SILK]  158.5,30.99 0 top
SJ53  SDA_SEL  [PAD-JUMPER-3-2OF3_NC_BY_PASTE_YES_SILK_FULL_BOX]  161.16,15.62 180 top
SJ54  SCL_SEL  [PAD-JUMPER-3-2OF3_NC_BY_PASTE_YES_SILK_FULL_BOX]  161.16,17.78 180 top
SJ55  JUMPER-PAD-2-NC_BY_PASTE  [PAD-JUMPER-2-NC_BY_PASTE_YES_SILK]  181.86,30.99 0 top
SJ56  JUMPER-PAD-2-NOYES_SILK  [PAD-JUMPER-2-NO_YES_SILK]  184.4,30.99 0 top
SJ57  JUMPER-PAD-2-NOYES_SILK  [PAD-JUMPER-2-NO_YES_SILK]  186.94,30.99 0 top
SJ58  JUMPER-PAD-2-NOYES_SILK  [PAD-JUMPER-2-NO_YES_SILK]  189.48,30.99 0 top
SJ59  SDA_SEL  [PAD-JUMPER-3-2OF3_NC_BY_PASTE_YES_SILK_FULL_BOX]  192.15,15.62 180 top
SJ60  SCL_SEL  [PAD-JUMPER-3-2OF3_NC_BY_PASTE_YES_SILK_FULL_BOX]  192.15,17.78 180 top
SJ61  JUMPER-PAD-2-NC_BY_PASTE  [PAD-JUMPER-2-NC_BY_PASTE_YES_SILK]  212.85,30.99 0 top
SJ62  JUMPER-PAD-2-NOYES_SILK  [PAD-JUMPER-2-NO_YES_SILK]  215.39,30.99 0 top
SJ63  JUMPER-PAD-2-NOYES_SILK  [PAD-JUMPER-2-NO_YES_SILK]  217.93,30.99 0 top
SJ64  JUMPER-PAD-2-NOYES_SILK  [PAD-JUMPER-2-NO_YES_SILK]  220.47,30.99 0 top
SJ65  SDA_SEL  [PAD-JUMPER-3-2OF3_NC_BY_PASTE_YES_SILK_FULL_BOX]  223.14,15.62 180 top
SJ66  SCL_SEL  [PAD-JUMPER-3-2OF3_NC_BY_PASTE_YES_SILK_FULL_BOX]  223.14,17.78 180 top
SJ67  JUMPER-PAD-2-NC_BY_PASTE  [PAD-JUMPER-2-NC_BY_PASTE_YES_SILK]  243.84,30.99 0 top
SJ68  JUMPER-PAD-2-NOYES_SILK  [PAD-JUMPER-2-NO_YES_SILK]  246.38,30.99 0 top
SJ69  JUMPER-PAD-2-NOYES_SILK  [PAD-JUMPER-2-NO_YES_SILK]  248.92,30.99 0 top
SJ70  JUMPER-PAD-2-NOYES_SILK  [PAD-JUMPER-2-NO_YES_SILK]  251.46,30.99 0 top
SJ71  SDA_SEL  [PAD-JUMPER-3-2OF3_NC_BY_PASTE_YES_SILK_FULL_BOX]  254.13,15.62 180 top
SJ72  SCL_SEL  [PAD-JUMPER-3-2OF3_NC_BY_PASTE_YES_SILK_FULL_BOX]  254.13,17.78 180 top
SJ73  JUMPER-PAD-2-NC_BY_PASTE  [PAD-JUMPER-2-NC_BY_PASTE_YES_SILK]  150.88,75.95 0 top
SJ74  JUMPER-PAD-2-NOYES_SILK  [PAD-JUMPER-2-NO_YES_SILK]  153.42,75.95 0 top
SJ75  JUMPER-PAD-2-NOYES_SILK  [PAD-JUMPER-2-NO_YES_SILK]  155.96,75.95 0 top
SJ76  JUMPER-PAD-2-NOYES_SILK  [PAD-JUMPER-2-NO_YES_SILK]  158.5,75.95 0 top
SJ77  SDA_SEL  [PAD-JUMPER-3-2OF3_NC_BY_PASTE_YES_SILK_FULL_BOX]  161.16,60.58 180 top
SJ78  SCL_SEL  [PAD-JUMPER-3-2OF3_NC_BY_PASTE_YES_SILK_FULL_BOX]  161.16,62.74 180 top
SJ79  JUMPER-PAD-2-NC_BY_PASTE  [PAD-JUMPER-2-NC_BY_PASTE_YES_SILK]  181.86,75.95 0 top
SJ80  JUMPER-PAD-2-NOYES_SILK  [PAD-JUMPER-2-NO_YES_SILK]  184.4,75.95 0 top
SJ81  JUMPER-PAD-2-NOYES_SILK  [PAD-JUMPER-2-NO_YES_SILK]  186.94,75.95 0 top
SJ82  JUMPER-PAD-2-NOYES_SILK  [PAD-JUMPER-2-NO_YES_SILK]  189.48,75.95 0 top
SJ83  SDA_SEL  [PAD-JUMPER-3-2OF3_NC_BY_PASTE_YES_SILK_FULL_BOX]  192.15,60.58 180 top
SJ84  SCL_SEL  [PAD-JUMPER-3-2OF3_NC_BY_PASTE_YES_SILK_FULL_BOX]  192.15,62.74 180 top
SJ85  JUMPER-PAD-2-NC_BY_PASTE  [PAD-JUMPER-2-NC_BY_PASTE_YES_SILK]  212.85,75.95 0 top
SJ86  JUMPER-PAD-2-NOYES_SILK  [PAD-JUMPER-2-NO_YES_SILK]  215.39,75.95 0 top
SJ87  JUMPER-PAD-2-NOYES_SILK  [PAD-JUMPER-2-NO_YES_SILK]  217.93,75.95 0 top
SJ88  JUMPER-PAD-2-NOYES_SILK  [PAD-JUMPER-2-NO_YES_SILK]  220.47,75.95 0 top
SJ89  SDA_SEL  [PAD-JUMPER-3-2OF3_NC_BY_PASTE_YES_SILK_FULL_BOX]  223.14,60.58 180 top
SJ90  SCL_SEL  [PAD-JUMPER-3-2OF3_NC_BY_PASTE_YES_SILK_FULL_BOX]  223.14,62.74 180 top
SJ91  JUMPER-PAD-2-NC_BY_PASTE  [PAD-JUMPER-2-NC_BY_PASTE_YES_SILK]  243.84,75.95 0 top
SJ92  JUMPER-PAD-2-NOYES_SILK  [PAD-JUMPER-2-NO_YES_SILK]  246.38,75.95 0 top
SJ93  JUMPER-PAD-2-NOYES_SILK  [PAD-JUMPER-2-NO_YES_SILK]  248.92,75.95 0 top
SJ94  JUMPER-PAD-2-NOYES_SILK  [PAD-JUMPER-2-NO_YES_SILK]  251.46,75.95 0 top
SJ95  SDA_SEL  [PAD-JUMPER-3-2OF3_NC_BY_PASTE_YES_SILK_FULL_BOX]  254.13,60.58 180 top
SJ96  SCL_SEL  [PAD-JUMPER-3-2OF3_NC_BY_PASTE_YES_SILK_FULL_BOX]  254.13,62.74 180 top
U1  ADS1015  [MSOP10]  20.83,39.88 90 top
U2  PCA9306  [PCA9306DC-1:1]  19.56,22.1 0 top
U3  3.3V  [SOT23-5]  26.67,34.8 270 top
U4  ADS1015  [MSOP10]  51.82,39.88 90 top
U5  PCA9306  [PCA9306DC-1:1]  50.55,22.1 0 top
U6  3.3V  [SOT23-5]  57.66,34.8 270 top
U7  ADS1015  [MSOP10]  82.8,39.88 90 top
U8  PCA9306  [PCA9306DC-1:1]  81.53,22.1 0 top
U9  3.3V  [SOT23-5]  88.65,34.8 270 top
U10  ADS1015  [MSOP10]  113.79,39.88 90 top
U11  PCA9306  [PCA9306DC-1:1]  112.52,22.1 0 top
U12  3.3V  [SOT23-5]  119.63,34.8 270 top
U13  ADS1015  [MSOP10]  20.83,84.84 90 top
U14  PCA9306  [PCA9306DC-1:1]  19.56,67.06 0 top
U15  3.3V  [SOT23-5]  26.67,79.76 270 top
U16  ADS1015  [MSOP10]  51.82,84.84 90 top
U17  PCA9306  [PCA9306DC-1:1]  50.55,67.06 0 top
U18  3.3V  [SOT23-5]  57.66,79.76 270 top
U19  ADS1015  [MSOP10]  82.8,84.84 90 top
U20  PCA9306  [PCA9306DC-1:1]  81.53,67.06 0 top
U21  3.3V  [SOT23-5]  88.65,79.76 270 top
U22  ADS1015  [MSOP10]  113.79,84.84 90 top
U23  PCA9306  [PCA9306DC-1:1]  112.52,67.06 0 top
U24  3.3V  [SOT23-5]  119.63,79.76 270 top
U25  ADS1015  [MSOP10]  158.5,39.88 90 top
U26  PCA9306  [PCA9306DC-1:1]  157.23,22.1 0 top
U27  3.3V  [SOT23-5]  164.34,34.8 270 top
U28  ADS1015  [MSOP10]  189.48,39.88 90 top
U29  PCA9306  [PCA9306DC-1:1]  188.21,22.1 0 top
U30  3.3V  [SOT23-5]  195.33,34.8 270 top
U31  ADS1015  [MSOP10]  220.47,39.88 90 top
U32  PCA9306  [PCA9306DC-1:1]  219.2,22.1 0 top
U33  3.3V  [SOT23-5]  226.31,34.8 270 top
U34  ADS1015  [MSOP10]  251.46,39.88 90 top
U35  PCA9306  [PCA9306DC-1:1]  250.19,22.1 0 top
U36  3.3V  [SOT23-5]  257.3,34.8 270 top
U37  ADS1015  [MSOP10]  158.5,84.84 90 top
U38  PCA9306  [PCA9306DC-1:1]  157.23,67.06 0 top
U39  3.3V  [SOT23-5]  164.34,79.76 270 top
U40  ADS1015  [MSOP10]  189.48,84.84 90 top
U41  PCA9306  [PCA9306DC-1:1]  188.21,67.06 0 top
U42  3.3V  [SOT23-5]  195.33,79.76 270 top
U43  ADS1015  [MSOP10]  220.47,84.84 90 top
U44  PCA9306  [PCA9306DC-1:1]  219.2,67.06 0 top
U45  3.3V  [SOT23-5]  226.31,79.76 270 top
U46  ADS1015  [MSOP10]  251.46,84.84 90 top
U47  PCA9306  [PCA9306DC-1:1]  250.19,67.06 0 top
U48  3.3V  [SOT23-5]  257.3,79.76 270 top

## Library data of the parts
C1-C4 C6-C9 C11-C14 C16-C19 C21-C24 C26-C29 C31-C34 C36-C39 C41-C44 C46-C49 C51-C54 C56-C59 C61-C64 C66-C69 C71-C74 C76-C79 = SparkFun-Capacitors; PROD_ID: CAP-00810
C5 C10 C15 C20 C25 C30 C35 C40 C45 C50 C55 C60 C65 C70 C75 C80 = SparkFun-Capacitors; PROD_ID: CAP-11330
E$1 E$4 E$5 E$9 = SparkFun-Retired
E$2 E$3 E$6-E$8 E$10-E$12 FID1-FID64 LOGO1-LOGO64 = SparkFun-Aesthetics
JP1 JP6 JP9 JP12 JP15 JP18 JP21 JP24 JP27 JP30 JP33 JP36 JP39 JP42 JP45 JP48 = SparkFun-Connectors
JP2-JP5 JP7 JP8 JP10 JP11 JP13 JP14 JP16 JP17 JP19 JP20 JP22 JP23 JP25 JP26 JP28 JP29 JP31 JP32 JP34 JP35 JP37 JP38 JP40 JP41 JP43 JP44 JP46 JP47 = SparkFun-Boards
R1 R2 R8 R9 R15 R16 R22 R23 R29 R30 R36 R37 R43 R44 R50 R51 R57 R58 R64 R65 R71 R72 R78 R79 R85 R86 R92 R93 R99 R100 R106 R107 = SparkFun-Resistors; PROD_ID: RES-00824
R3 R10 R17 R24 R31 R38 R45 R52 R59 R66 R73 R80 R87 R94 R101 R108 = SparkFun-Resistors; PROD_ID: RES-09385
R4-R6 R11-R13 R18-R20 R25-R27 R32-R34 R39-R41 R46-R48 R53-R55 R60-R62 R67-R69 R74-R76 R81-R83 R88-R90 R95-R97 R102-R104 R109-R111 = SparkFun-Resistors; PROD_ID: RES-08272
R7 R14 R21 R28 R35 R42 R49 R56 R63 R70 R77 R84 R91 R98 R105 R112 = SparkFun-Resistors; PROD_ID: RES-08787
SJ1-SJ96 = SparkFun-Passives
U1 U4 U7 U10 U13 U16 U19 U22 U25 U28 U31 U34 U37 U40 U43 U46 = SparkFun-AnalogIC; PROD_ID: IC-12239
U2 U5 U8 U11 U14 U17 U20 U23 U26 U29 U32 U35 U38 U41 U44 U47 = SparkFun-DigitalIC; PROD_ID: IC-10023
U3 U6 U9 U12 U15 U18 U21 U24 U27 U30 U33 U36 U39 U42 U45 U48 = SparkFun-PowerIC; PROD_ID: VREG-00822